# Allegro board SAMA5D2-XULT RevA.brd
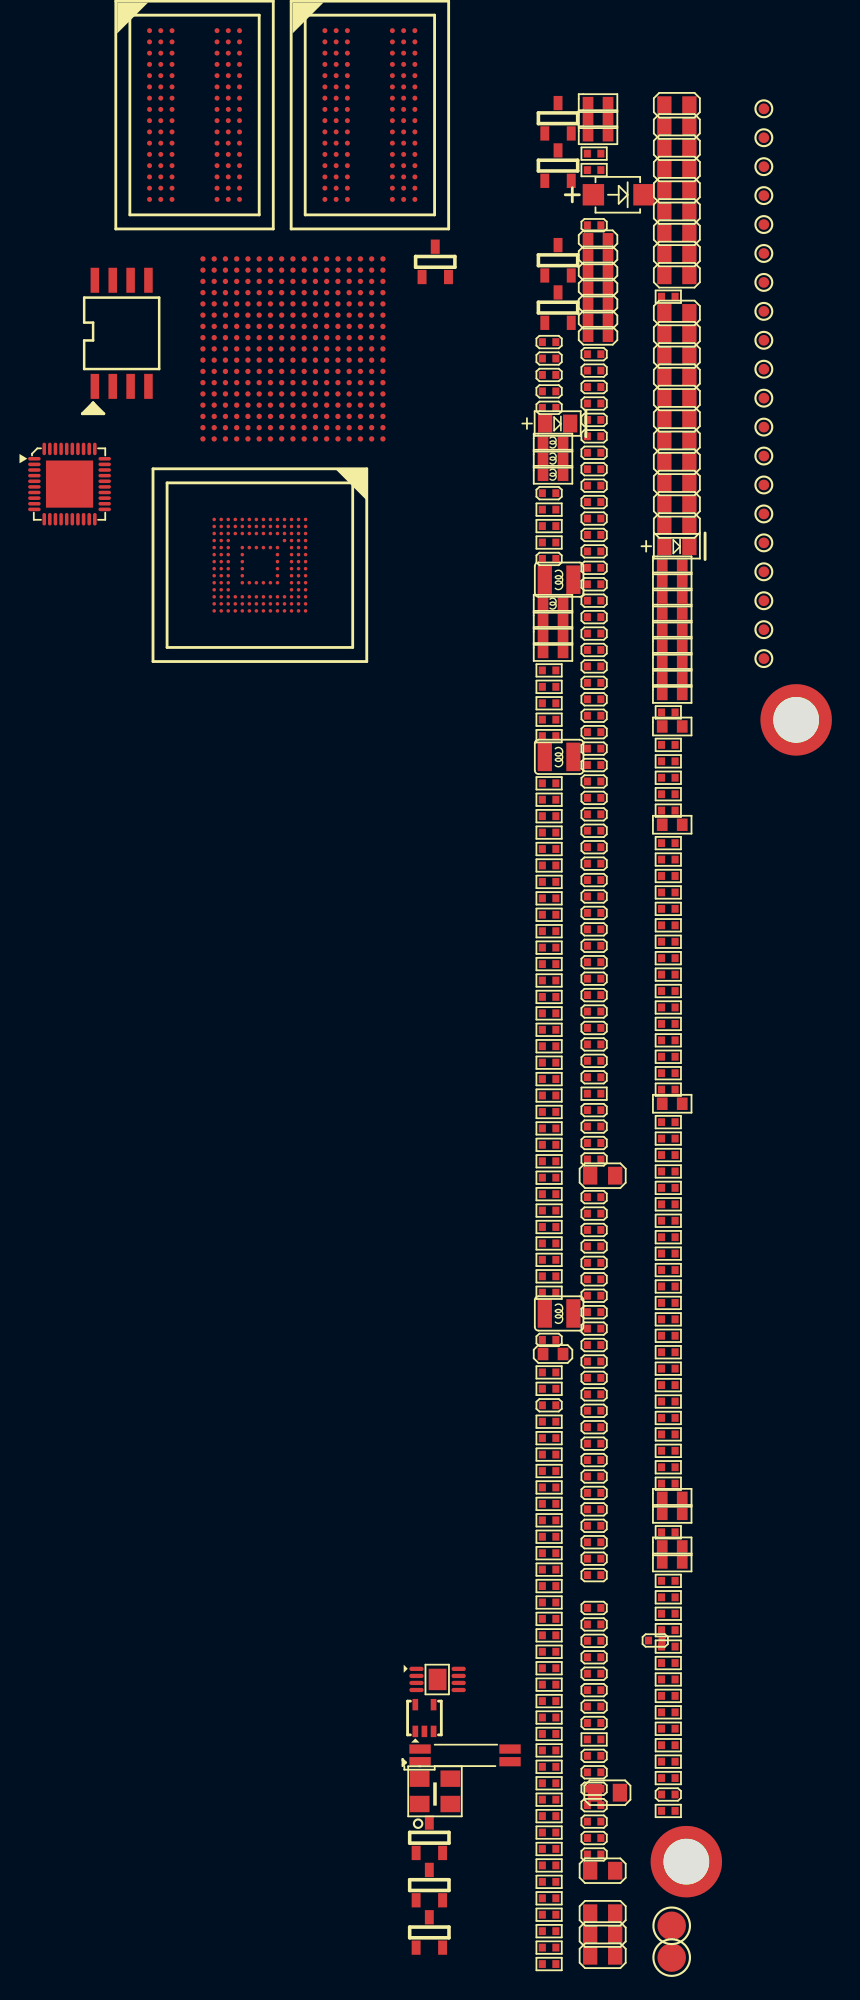
[diagram p0: board, top side]
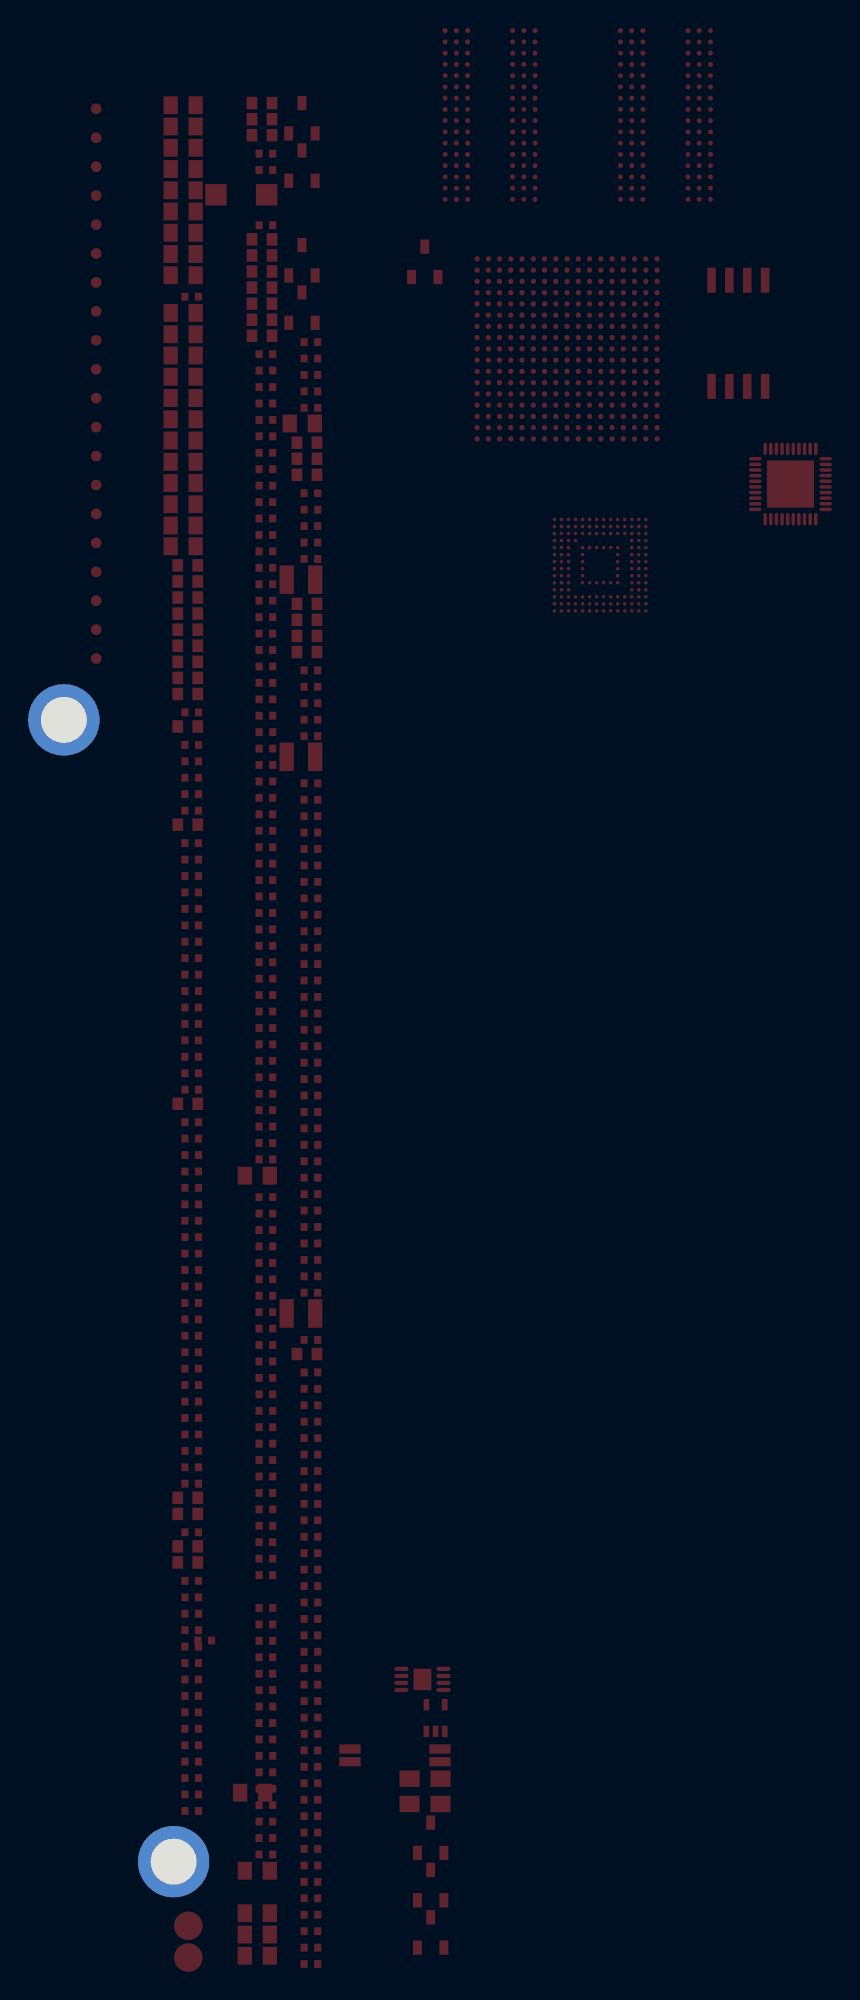
[diagram p1: board, bottom side, seen from below]

No outline. copper layers: TOP, GND2, INT3, INT4, VCC5, BOTTOM. Coordinates in mm from the lowest, leftmost part position.

## Design rules (mm)
net group DIFFPAIR26: nets USBA_DM USBA_DP
net group DIFFPAIR36: nets USBB_DM USBB_DP
net group DIFFPAIR37: nets DDR_CLK+ DDR_CLK-
net group DIFFPAIR38: nets DDR_DQS1+ DDR_DQS1-
net group DIFFPAIR39: nets DDR_DQS2+ DDR_DQS2-
net group DIFFPAIR40: nets DDR_DQS0+ DDR_DQS0-
net group DIFFPAIR41: nets DDR_DQS3+ DDR_DQS3-

## Placement (name value [footprint] x y rotation side)
C1  100nF  [C0402]  277.45 205.29 0 top
C2  10uF  [C0805]  283.33 235.98 0 top
C3  10uF  [C0805]  283.33 237.49 0 top
C7  DNP(1nF)  [C0402]  274.25 208.26 0 top
C8  100nF  [C0402]  277.45 204.12 0 top
C10  100nF  [C0402]  277.45 202.95 0 top
C13  4.7uF  [C0805]  283.33 219.7 0 top
C17  4.7uF  [C0805]  283.33 222.72 0 top
C20  10uF  [C0805]  278.06 111.97 0 top
C22  10uF  [C0805]  278.06 108.95 0 top
C23  10uF  [C0805]  278.06 110.46 0 top
C24  100nF  [C0402]  277.45 209.96 0 top
C27  10uF  [C0805]  283.33 234.47 0 top
C28  10uF  [C0805]  278.06 164.41 0 top
C29  100nF  [C0402]  277.45 198.28 0 top
C30  1nF  [C0402]  277.45 123.16 0 top
C31  100nF  [C0402]  277.45 200.62 0 top
C37  10uF  [C0805]  283.33 240.52 0 top
C38  100nF  [C0402]  277.45 206.46 0 top
C40  22pF  [C0402]  274.25 220.17 0 top
C41  22pF  [C0402]  274.25 221.34 0 top
C43  4.7uF  [C0805]  283.33 215.17 0 top
C44  DNP(1uF)  [C0603]  274.53 151.73 0 top
C45  100nF  [C0402]  277.45 167.9 0 top
C46  100nF  [C0402]  277.45 222.82 0 top
C47  27pF  [C0402]  274.25 219 0 top
C48  27pF  [C0402]  274.25 212.93 0 top
C51  100nF  [C0402]  277.45 221.65 0 top
C52  100nF  [C0402]  277.45 211.13 0 top
C54  100nF  [C0402]  277.45 132.51 0 top
C55  100nF  [C0402]  277.45 131.34 0 top
C56  4.7uF  [C0805]  283.33 225.75 0 top
C58  100nF  [C0402]  277.45 219.31 0 top
C59  10uF  [C0805]  283.33 228.43 0 top
C60  10uF  [C0805]  283.33 239.01 0 top
C61  2.2uF  [C0603]  277.73 227.55 0 top
C63  100nF  [C0402]  277.45 212.3 0 top
C65  100nF  [C0402]  277.45 147.7 0 top
C66  100nF  [C0402]  277.45 136.01 0 top
C67  1nF  [C0402]  277.45 125.5 0 top
C68  100nF  [C0402]  277.45 161.72 0 top
C69  100nF  [C0402]  277.45 207.63 0 top
C70  10uF  [C0805]  283.33 232.96 0 top
C71  10uF  [C0805]  283.33 231.45 0 top
C72  100nF  [C0402]  277.45 187.76 0 top
C73  2.2uF  [C0603]  277.73 226.41 0 top
C74  1nF  [C0402]  277.45 127.83 0 top
C76  100nF  [C0402]  277.45 154.71 0 top
C77  100nF  [C0402]  277.45 150.03 0 top
C78  100nF  [C0402]  277.45 130.17 0 top
C79  100nF  [C0402]  277.45 165.57 0 top
C80  100nF  [C0402]  277.45 172.58 0 top
C81  100nF  [C0402]  277.45 208.8 0 top
C82  1nF  [C0402]  277.45 126.67 0 top
C83  4.7uF  [C0805]  283.33 212.15 0 top
C84  1nF  [C0402]  277.45 119.65 0 top
C85  1uF  [C0603]  277.73 230.98 0 top
C87  100nF  [C0402]  277.45 162.89 0 top
C88  100nF  [C0402]  277.45 195.94 0 top
C89  100nF  [C0402]  277.45 153.54 0 top
C90  100nF  [C0402]  274.25 152.73 0 top
C91  100nF  [C0402]  277.45 158.21 0 top
C92  100nF  [C0402]  277.45 139.52 0 top
C93  100nF  [C0402]  277.45 148.86 0 top
C94  100nF  [C0402]  277.45 218.14 0 top
C95  100nF  [C0402]  277.45 157.04 0 top
C96  100nF  [C0402]  277.45 138.35 0 top
C97  1nF  [C0402]  277.45 117.32 0 top
C98  2.2uF  [C0603]  277.73 224.12 0 top
C99  100nF  [C0402]  277.45 137.18 0 top
C100  100nF  [C0402]  277.45 129 0 top
C101  100nF  [C0402]  277.45 166.73 0 top
C102  100nF  [C0402]  277.45 194.78 0 top
C103  100nF  [C0402]  277.45 176.08 0 top
C104  100nF  [C0402]  277.45 173.74 0 top
C105  1nF  [C0402]  277.45 118.49 0 top
C106  22pF  [C0402]  274.25 223.68 0 top
C107  100nF  [C0402]  277.45 177.25 0 top
C108  100nF  [C0402]  277.45 199.45 0 top
C109  22pF  [C0402]  274.25 222.51 0 top
C110  100nF  [C0402]  277.45 145.36 0 top
C111  100nF  [C0402]  277.45 191.27 0 top
C112  100nF  [C0402]  277.45 152.37 0 top
C113  100nF  [C0402]  277.45 186.6 0 top
C114  100nF  [C0402]  282.72 120.41 0 top
C115  100nF  [C0402]  277.45 143.02 0 top
C116  100nF  [C0402]  277.45 141.85 0 top
C117  100nF  [C0402]  277.45 216.97 0 top
C118  100nF  [C0402]  277.45 185.43 0 top
C119  100nF  [C0402]  277.45 171.41 0 top
C120  100nF  [C0402]  277.45 192.44 0 top
C121  100nF  [C0402]  277.45 155.88 0 top
C122  1nF  [C0402]  277.45 121.99 0 top
C123  100nF  [C0402]  277.45 146.53 0 top
C124  2.2uF  [C0603]  277.73 228.7 0 top
C125  100nF  [C0402]  277.45 169.07 0 top
C126  100nF  [C0402]  277.45 174.91 0 top
C127  10pF  [C0402]  277.45 116.15 0 top
C128  100nF  [C0402]  277.45 178.42 0 top
C129  100nF  [C0402]  277.45 151.2 0 top
C130  100nF  [C0402]  277.45 213.47 0 top
C131  100nF  [C0402]  277.45 193.61 0 top
C132  100nF  [C0402]  277.45 197.11 0 top
C133  100nF  [C0402]  277.45 188.93 0 top
C134  100nF  [C0402]  277.45 133.68 0 top
C135  100nF  [C0402]  277.45 180.75 0 top
C136  100nF  [C0402]  281.8 131.36 0 top
C137  1nF  [C0402]  277.45 120.82 0 top
C138  100nF  [C0402]  277.45 183.09 0 top
C139  100nF  [C0402]  277.45 215.81 0 top
C140  100nF  [C0402]  277.45 190.1 0 top
C141  1nF  [C0402]  277.45 231.99 0 top
C142  4.7uF  [C0805]  283.33 213.66 0 top
C143  100nF  [C0402]  277.45 201.79 0 top
C144  100nF  [C0402]  277.45 179.59 0 top
C145  100nF  [C0402]  277.45 184.26 0 top
C146  100nF  [C0402]  277.45 159.38 0 top
C147  4.7uF  [C0805]  283.33 216.68 0 top
C148  4.7uF  [C0805]  283.33 210.63 0 top
C149  100nF  [C0402]  277.45 144.19 0 top
C150  100nF  [C0402]  277.45 140.69 0 top
C151  100nF  [C0402]  277.45 214.64 0 top
C152  2.2uF  [C0603]  277.73 229.84 0 top
C153  100nF  [C0402]  277.45 160.55 0 top
C154  2.2uF  [C0603]  277.73 225.27 0 top
C161  100nF  [C0402]  277.45 181.92 0 top
C163  10uF  [C0805]  283.33 229.94 0 top
C164  10uF  [C0805]  278.06 114.99 0 top
C165  4.7uF  [C0805]  283.33 218.19 0 top
C166  47nF  [C0402]  274.25 148.09 0 top
C167  100nF  [C0402]  277.45 220.48 0 top
C169  4.7uF  [C0805]  283.33 224.24 0 top
C173  4.7uF  [C0805]  283.33 221.21 0 top
C176  10uF  [C0805]  278.39 120.54 0 top
D1  RED  [LED0805]  274.86 217.89 0 top
D3  BLUE  [LED0805]  283.33 209.16 0 top
D6  BAT54C  [SOT23_123]  265.73 117.34 0 top
D9  (replaced with 0R-1206 -see User Guide)  [SOD123]  279.2 234.15 0 top
L1  2.2uH  [L1008]  274.96 154.61 0 top
L3  180ohm at 100MHz  [R0603]  283 198.66 0 top
L5  2.2uH  [L1008]  274.96 194.19 0 top
L6  2.2uH  [L1008]  274.96 206.79 0 top
L7  180ohm at 100MHz  [R0603]  283 203.23 0 top
L8  180ohm at 100MHz  [R0603]  283 204.37 0 top
L9  180ohm at 100MHz  [R0603]  283 206.66 0 top
L10  180ohm at 100MHz  [R0603]  283 207.8 0 top
L12  10uH_150mA  [L0603]  274.53 216.53 0 top
L14  10uH_150mA  [L0603]  274.53 205.07 0 top
L16  180ohm at 100MHz  [R0603]  283 205.52 0 top
L18  180ohm at 100MHz  [R0603]  283 200.94 0 top
L19  180ohm at 100MHz  [R0603]  283 199.8 0 top
L20  10uH_150mA  [L0603]  274.53 215.38 0 top
L22  10uH_150mA  [L0603]  274.53 214.24 0 top
L23  180ohm at 100MHz  [R0603]  283 202.09 0 top
MH1  PTH  [MHC50D30]  291.82 196.82 0 top
MH2  PTH  [MHC50D30]  284.01 115.64 0 top
NOREF  -  []  120.93 117 90 top
NOREF#2  -  []  32.93 117 0 top
NOREF#3  -  []  74.5 161.16 0 top
NOREF#4  -  []  0 233.93 270 bottom
NOREF#5  -  []  59.21 0 270 bottom
NOREF#6  -  []  139.89 317.19 90 bottom
Q1  BSS138  [SOT23_123]  274.88 229.49 0 top
Q2  BSS138  [SOT23_123]  265.73 113.97 0 top
Q3  BSS138  [SOT23_123]  274.88 226.13 0 top
Q6  BSS138  [SOT23_123]  274.88 236.22 0 top
Q8  BSS138  [SOT23_123]  274.88 239.59 0 top
Q9  BSS138  [SOT23_123]  265.73 110.61 0 top
R6  10K  [R0402]  274.25 136.4 0 top
R7  10K  [R0402]  274.25 135.23 0 top
R8  68K  [R0402]  274.25 141.08 0 top
R9  1K  [R0402]  274.25 143.41 0 top
R12  100K  [R0402]  274.25 156.09 0 top
R13  49.9K 1%  [R0402]  282.72 125.09 0 top
R14  49.9K 1%  [R0402]  282.72 126.26 0 top
R15  100K  [R0402]  274.25 195.66 0 top
R16  100R 1%  [R0402]  274.25 120.04 0 top
R17  100R 1%  [R0402]  274.25 118.88 0 top
R18  11K 1%  [R0402]  274.25 200.33 0 top
R19  0R  [R0402]  282.72 135.6 0 top
R20  100R 1%  [R0402]  274.25 117.71 0 top
R21  2.2M 1%  [R0402]  274.25 158.42 0 top
R22  1.5M 1%  [R0402]  274.25 157.26 0 top
R24  DNP(3.9K 1%)  [R0402]  274.25 149.25 0 top
R26  DNP(8.2K 1%)  [R0402]  274.25 182.96 0 top
R27  2.43K 1%  [R0402]  274.25 189.97 0 top
R30  0R  [R0402]  282.72 133.27 0 top
R41  DNP(0R)  [R0402]  282.72 195.04 0 top
R44  100R 1%  [R0402]  274.25 150.42 0 top
R45  1K  [R0402]  274.25 145.75 0 top
R47  22R  [R0402]  282.72 190.36 0 top
R48  10K  [R0402]  274.25 128.22 0 top
R49  39R  [R0402]  282.72 139.06 0 top
R60  10K  [R0402]  274.25 127.06 0 top
R61  22R  [R0402]  282.72 144.85 0 top
R63  470R  [R0402]  274.25 142.24 0 top
R65  10K  [R0402]  274.25 129.39 0 top
R66  10K  [R0402]  274.25 125.89 0 top
R69  1K  [R0402]  274.25 144.58 0 top
R72  22R  [R0402]  277.45 124.33 0 top
R73  22R  [R0402]  282.72 188.05 0 top
R83  22R  [R0402]  282.72 158.87 0 top
R84  22R  [R0402]  282.72 186.88 0 top
R85  22R  [R0402]  282.72 185.72 0 top
R86  22R  [R0402]  282.72 153.03 0 top
R87  22R  [R0402]  282.72 160.04 0 top
R88  22R  [R0402]  282.72 181.04 0 top
R89  22R  [R0402]  282.72 182.21 0 top
R90  22R  [R0402]  282.72 197.35 0 top
R91  100R 1%  [R0402]  274.25 111.87 0 top
R94  100R 1%  [R0402]  274.25 113.03 0 top
R96  DNP(0R)  [R0402]  274.25 209.43 0 top
R97  22R  [R0402]  282.72 168.22 0 top
R100  10K  [R0402]  274.25 138.74 0 top
R101  22R  [R0402]  282.72 192.7 0 top
R102  22R  [R0402]  282.72 191.53 0 top
R103  DNP(1M)  [R0402]  274.25 121.21 0 top
R105  47K  [R0402]  274.25 181.79 0 top
R107  22R  [R0402]  282.72 226.9 0 top
R108  22R  [R0402]  282.72 171.7 0 top
R109  22R  [R0402]  282.72 147.18 0 top
R115  22R  [R0402]  282.72 148.35 0 top
R117  100R 1%  [R0402]  274.25 109.53 0 top
R119  100R 1%  [R0402]  274.25 110.7 0 top
R121  DNP(0R)  [R0402]  274.25 210.6 0 top
R123  100R 1%  [R0402]  274.25 114.2 0 top
R124  240R 1%  [R0402]  274.25 159.59 0 top
R125  2.2K  [R0402]  274.25 187.63 0 top
R126  2.2K  [R0402]  274.25 188.8 0 top
R127  10K  [R0402]  274.25 134.07 0 top
R128  DNP(10K)  [R0402]  274.25 124.72 0 top
R129  2R2  [R0603]  274.53 203.93 0 top
R131  1R 1%  [R0603]  277.73 240.67 0 top
R138  DNP(1M)  [R0402]  274.25 122.38 0 top
R139  DNP(2.2K)  [R0402]  274.25 166.6 0 top
R140  39R  [R0402]  282.72 122.75 0 top
R142  47K  [R0402]  274.25 180.62 0 top
R143  22R  [R0402]  282.72 155.36 0 top
R144  47K  [R0402]  274.25 178.29 0 top
R145  22R  [R0402]  282.72 175.2 0 top
R146  100R 1%  [R0402]  274.25 115.37 0 top
R147  47K  [R0402]  274.25 177.12 0 top
R149  47K  [R0402]  274.25 170.11 0 top
R151  47K  [R0402]  274.25 174.78 0 top
R152  1K  [R0402]  274.25 146.92 0 top
R153  DNP(100R 1%)  [R0402]  277.45 237.08 0 top
R154  22R  [R0402]  282.72 174.03 0 top
R155  0R  [R0402]  282.72 132.1 0 top
R157  22R  [R0402]  282.72 150.69 0 top
R158  DNP(0R)  [R0402]  282.72 193.87 0 top
R159  22R  [R0402]  282.72 161.21 0 top
R163  39R  [R0402]  282.72 119.24 0 top
R164  22R  [R0402]  282.72 154.2 0 top
R165  39R  [R0402]  282.72 142.51 0 top
R167  22R  [R0402]  282.72 149.52 0 top
R168  22R  [R0402]  282.72 146.02 0 top
R169  22R  [R0402]  282.72 157.7 0 top
R172  22R  [R0402]  282.72 179.87 0 top
R173  22R  [R0402]  282.72 178.71 0 top
R174  22R  [R0402]  282.72 177.54 0 top
R175  22R  [R0402]  282.72 176.37 0 top
R178  0R  [R0402]  282.72 128.59 0 top
R179  DNP(1K)  [R0402]  274.25 163.1 0 top
R180  6.8K 1%  [R0402]  274.25 164.27 0 top
R181  6.8K 1%  [R0402]  274.25 165.43 0 top
R182  1R 1%  [R0603]  277.73 238.38 0 top
R195  DNP  [R0402]  277.45 170.24 0 top
R210  DNP(0R)  [R0603]  283 136.91 0 top
R212  DNP(0R)  [R0603]  283 138.05 0 top
R218  10K  [R0402]  274.25 131.73 0 top
R226  10K  [R0402]  274.25 132.9 0 top
R227  100R 1%  [R0402]  274.25 116.54 0 top
R230  10K  [R0402]  274.25 139.91 0 top
R232  47K  [R0402]  274.25 172.45 0 top
R233  47K  [R0402]  274.25 173.61 0 top
R234  47K  [R0402]  274.25 175.95 0 top
R235  DNP(47K)  [R0402]  274.25 168.94 0 top
R236  47K  [R0402]  274.25 171.28 0 top
R237  47K  [R0402]  274.25 179.46 0 top
R238  240R 1%  [R0402]  274.25 160.76 0 top
R242  100K  [R0402]  274.25 191.14 0 top
R243  100K  [R0402]  274.25 192.31 0 top
R250  23.2K 1%  [R0402]  274.25 211.76 0 top
R254  DNP(1K)  [R0402]  274.25 161.93 0 top
R255  DNP(47K)  [R0402]  274.25 167.77 0 top
R256  20K 1%  [R0402]  274.25 184.13 0 top
R258  0R  [R0402]  282.72 127.42 0 top
R263  5.62K 1%  [R0402]  277.45 235.91 0 top
R264  0R  [R0603]  283 169.52 0 top
R267  22R  [R0402]  282.72 162.37 0 top
R269  1R 1%  [R0603]  277.73 239.53 0 top
R270  0R  [R0402]  282.72 130.93 0 top
R272  10K  [R0402]  274.25 137.57 0 top
R274  22R  [R0402]  282.72 172.86 0 top
R278  39R  [R0402]  282.72 129.76 0 top
R279  39R  [R0402]  282.72 121.58 0 top
R280  100R 1%  [R0402]  274.25 108.36 0 top
R281  0R  [R0402]  282.72 134.43 0 top
R282  39R  [R0402]  282.72 143.68 0 top
R284  0R  [R0603]  283 189.36 0 top
R285  39R  [R0402]  282.72 123.92 0 top
R288  22R  [R0402]  282.72 184.55 0 top
R289  22R  [R0402]  282.72 151.86 0 top
R291  22R  [R0402]  282.72 164.71 0 top
R293  2R2  [R0603]  274.53 202.79 0 top
R296  22R  [R0402]  282.72 163.54 0 top
R297  22R  [R0402]  282.72 167.05 0 top
R300  2R2  [R0603]  274.53 201.64 0 top
R303  0R  [R0603]  283 140.36 0 top
R304  22R  [R0402]  282.72 170.53 0 top
R306  2.2K  [R0402]  274.25 186.47 0 top
R307  22R  [R0402]  282.72 183.38 0 top
R308  22R  [R0402]  282.72 165.88 0 top
R309  2.2K  [R0402]  274.25 185.3 0 top
R316  0R  [R0402]  282.72 156.53 0 top
R319  10K  [R0402]  274.25 130.56 0 top
R320  DNP(10K)  [R0402]  274.25 123.55 0 top
R327  0R  [R0603]  283 196.35 0 top
R330  0R  [R0603]  283 141.51 0 top
R332  100K  [R0402]  274.25 196.83 0 top
R333  100K  [R0402]  274.25 199.17 0 top
R346  100K  [R0402]  274.25 198 0 top
TP3  SMD  [TP30]  289.52 211.46 0 top
TP5  SMD  [TP30]  289.52 219.69 0 top
TP6  SMD  [TP30]  289.52 215.57 0 top
TP7  SMD  [TP30]  289.52 217.63 0 top
TP8  SMD  [TP30]  289.52 234.09 0 top
TP9  SMD  [TP30]  289.52 221.75 0 top
TP10  SMD  [TP30]  289.52 203.23 0 top
TP11  SMD  [TP80]  282.97 111.08 0 top
TP13  SMD  [TP30]  289.52 227.92 0 top
TP14  SMD  [TP80]  282.97 108.82 0 top
TP15  SMD  [TP30]  289.52 213.52 0 top
TP16  SMD  [TP30]  289.52 236.15 0 top
TP17  SMD  [TP30]  289.52 238.21 0 top
TP18  SMD  [TP30]  289.52 223.8 0 top
TP19  SMD  [TP30]  289.52 225.86 0 top
TP20  SMD  [TP30]  289.52 201.17 0 top
TP21  SMD  [TP30]  289.52 232.03 0 top
TP23  SMD  [TP30]  289.52 205.29 0 top
TP24  SMD  [TP30]  289.52 207.34 0 top
TP25  SMD  [TP30]  289.52 209.4 0 top
TP26  SMD  [TP30]  289.52 229.98 0 top
TP30  SMD  [TP30]  289.52 240.26 0 top
U2  ACT8945AQJ405-T  [QFN40_1P4H]  240.14 213.58 0 top
U4  MT41K128M16JT-125:K  [BGADDR96P8B90X140]  249.03 239.82 0 top
U7  TLV431A  [SOT23_123]  266.15 229.38 0 top
U8  MT41K128M16JT-125:K  [BGADDR96P8B90X140]  261.5 239.82 0 top
U10  MX25L25673GM2I-08G  [SOIC8JG]  243.85 224.3 0 top
U11  MTFC4GLDEA-0M WT  [BGA153P5]  253.68 207.82 270 top
U15  NL17SZ126DFT2G  [SOT353_5]  265.38 125.85 0 top
U18  AT24MAC402-MAHM-T  [DFN8_1P5R]  266.32 128.59 0 top
U24  SAMA5D27C-CU (MRLC)  [BGA289P8]  256.03 223.19 0 top
Y3  32.768KHz CL=12.5pF  [X4S70X15]  268.27 123.19 0 top
Y4  12MHz CL=15pF  [X4S32X25]  266.13 120.64 0 top

## Library data of the parts
C1 C7 C8 C10 C24 C29-C31 C38 C40 C41 C45-C48 C51 C52 C54 C55 C58 C63 C65-C69 C72 C74 C76-C82 C84 C87-C97 C99-C123 C125-C141 C143-C146 C149-C151 C153 C161 C167 = C0402
C2 C3 C13 C17 C20 C22 C23 C27 C28 C37 C43 C44 C56 C59-C61 C70 C71 C73 C83 C85 C98 C124 C142 C147 C148 C152 C154 C163-C165 C169 C173 C176 = C0603
C166 = C_Generic
D1 = Led RED KPG-1608_0
D3 = Led Blue KPG-1608_0
D6 = SSL-LX15D-RP/SOT23_2
D9 = RB160M-60TR
L1 L5 L6 = L_10uH-150 mA
L3 L7-L10 L16 L18 L19 L23 = BEAD_ FERRITE
L12 L14 L20 L22 = L_SMT
MH1 MH2 = PTH_2
Q1-Q3 Q6 Q8 Q9 = IRLML2402_0
R6-R9 R12-R22 R24 R26 R27 R30 R41 R45 R48 R49 R60 R63 R65 R66 R69 R91 R94 R100 R103 R105 R117 R119 R123 R124 R127-R129 R131 R138 R140 R142 R144 R146 R147 R149 R151-R153 R155 R158 R163 R165 R178-R182 R195 R210 R212 R218 R226 R227 R230 R232-R238 R242 R243 R250 R254-R256 R258 R263 R264 R269 R270 R272 R278-R282 R284 R285 R293 R300 R303 R316 R319 R320 R327 R330 R332 R333 R346 = R_Generic
R44 R47 R61 R72 R73 R83-R90 R96 R97 R101 R102 R107-R109 R115 R121 R125 R126 R139 R143 R145 R154 R157 R159 R164 R167-R169 R172-R175 R267 R274 R288 R289 R291 R296 R297 R304 R306-R309 = R_Generic_0
TP3 TP5-TP11 TP13-TP21 TP23-TP26 TP30 = TP
U2 = ACT8945A
U4 U8 = MT41K128M16JT-125
U7 = TLV431A
U10 = QSPI_8Pin
U11 = eMMC
U15 = 1G126_0
U18 = AT24C08B-PU
U24 = SAMA5D27_CU_MRLC
Y3 = 32_0.768K
Y4 = XTAL_13Y_A

## Footprints (pads in the part's own frame, mm; a bottom-side part is the same pattern mirrored in y, then rotated)
BGA153P5
  round 0.254 smd: A1(-3.25,3.25) A2(-2.75,3.25) A3(-2.25,3.25) A4(-1.75,3.25) A5(-1.25,3.25) A6(-0.75,3.25) A7(-0.25,3.25) A8(0.25,3.25) A9(0.75,3.25) A10(1.25,3.25) A11(1.75,3.25) A12(2.25,3.25) A13(2.75,3.25) A14(3.25,3.25) B1(-3.25,2.75) B2(-2.75,2.75) B3(-2.25,2.75) B4(-1.75,2.75) B5(-1.25,2.75) B6(-0.75,2.75) B7(-0.25,2.75) B8(0.25,2.75) B9(0.75,2.75) B10(1.25,2.75) B11(1.75,2.75) B12(2.25,2.75) B13(2.75,2.75) B14(3.25,2.75) C1(-3.25,2.25) C2(-2.75,2.25) C3(-2.25,2.25) C4(-1.75,2.25) C5(-1.25,2.25) C6(-0.75,2.25) C7(-0.25,2.25) C8(0.25,2.25) C9(0.75,2.25) C10(1.25,2.25) C11(1.75,2.25) C12(2.25,2.25) C13(2.75,2.25) C14(3.25,2.25) D1(-3.25,1.75) D2(-2.75,1.75) D3(-2.25,1.75) D4(-1.75,1.75) D12(2.25,1.75) D13(2.75,1.75) D14(3.25,1.75) E1(-3.25,1.25) E2(-2.75,1.25) E3(-2.25,1.25) E5(-1.25,1.25) E6(-0.75,1.25) E7(-0.25,1.25) E8(0.25,1.25) E9(0.75,1.25) E10(1.25,1.25) E12(2.25,1.25) E13(2.75,1.25) E14(3.25,1.25) F1(-3.25,0.75) F2(-2.75,0.75) F3(-2.25,0.75) F5(-1.25,0.75) F10(1.25,0.75) F12(2.25,0.75) F13(2.75,0.75) F14(3.25,0.75) G1(-3.25,0.25) G2(-2.75,0.25) G3(-2.25,0.25) G5(-1.25,0.25) G10(1.25,0.25) G12(2.25,0.25) G13(2.75,0.25) G14(3.25,0.25) H1(-3.25,-0.25) H2(-2.75,-0.25) H3(-2.25,-0.25) H5(-1.25,-0.25) H10(1.25,-0.25) H12(2.25,-0.25) H13(2.75,-0.25) H14(3.25,-0.25) J1(-3.25,-0.75) J2(-2.75,-0.75) J3(-2.25,-0.75) J5(-1.25,-0.75) J10(1.25,-0.75) J12(2.25,-0.75) J13(2.75,-0.75) J14(3.25,-0.75) K1(-3.25,-1.25) K2(-2.75,-1.25) K3(-2.25,-1.25) K5(-1.25,-1.25) K6(-0.75,-1.25) K7(-0.25,-1.25) K8(0.25,-1.25) K9(0.75,-1.25) K10(1.25,-1.25) K12(2.25,-1.25) K13(2.75,-1.25) K14(3.25,-1.25) L1(-3.25,-1.75) L2(-2.75,-1.75) L3(-2.25,-1.75) L12(2.25,-1.75) L13(2.75,-1.75) L14(3.25,-1.75) M1(-3.25,-2.25) M2(-2.75,-2.25) M3(-2.25,-2.25) M4(-1.75,-2.25) M5(-1.25,-2.25) M6(-0.75,-2.25) M7(-0.25,-2.25) M8(0.25,-2.25) M9(0.75,-2.25) M10(1.25,-2.25) M11(1.75,-2.25) M12(2.25,-2.25) M13(2.75,-2.25) M14(3.25,-2.25) N1(-3.25,-2.75) N2(-2.75,-2.75) N3(-2.25,-2.75) N4(-1.75,-2.75) N5(-1.25,-2.75) N6(-0.75,-2.75) N7(-0.25,-2.75) N8(0.25,-2.75) N9(0.75,-2.75) N10(1.25,-2.75) N11(1.75,-2.75) N12(2.25,-2.75) N13(2.75,-2.75) N14(3.25,-2.75) P1(-3.25,-3.25) P2(-2.75,-3.25) P3(-2.25,-3.25) P4(-1.75,-3.25) P5(-1.25,-3.25) P6(-0.75,-3.25) P7(-0.25,-3.25) P8(0.25,-3.25) P9(0.75,-3.25) P10(1.25,-3.25) P11(1.75,-3.25) P12(2.25,-3.25) P13(2.75,-3.25) P14(3.25,-3.25)
BGA289P8
  round 0.381 smd: A1(-6.4,6.4) A2(-5.6,6.4) A3(-4.8,6.4) A4(-4,6.4) A5(-3.2,6.4) A6(-2.4,6.4) A7(-1.6,6.4) A8(-0.8,6.4) A9(0,6.4) A10(0.8,6.4) A11(1.6,6.4) A12(2.4,6.4) A13(3.2,6.4) A14(4,6.4) A15(4.8,6.4) A16(5.6,6.4) A17(6.4,6.4) B1(-6.4,5.6) B2(-5.6,5.6) B3(-4.8,5.6) B4(-4,5.6) B5(-3.2,5.6) B6(-2.4,5.6) B7(-1.6,5.6) B8(-0.8,5.6) B9(0,5.6) B10(0.8,5.6) B11(1.6,5.6) B12(2.4,5.6) B13(3.2,5.6) B14(4,5.6) B15(4.8,5.6) B16(5.6,5.6) B17(6.4,5.6) C1(-6.4,4.8) C2(-5.6,4.8) C3(-4.8,4.8) C4(-4,4.8) C5(-3.2,4.8) C6(-2.4,4.8) C7(-1.6,4.8) C8(-0.8,4.8) C9(0,4.8) C10(0.8,4.8) C11(1.6,4.8) C12(2.4,4.8) C13(3.2,4.8) C14(4,4.8) C15(4.8,4.8) C16(5.6,4.8) C17(6.4,4.8) D1(-6.4,4) D2(-5.6,4) D3(-4.8,4) D4(-4,4) D5(-3.2,4) D6(-2.4,4) D7(-1.6,4) D8(-0.8,4) D9(0,4) D10(0.8,4) D11(1.6,4) D12(2.4,4) D13(3.2,4) D14(4,4) D15(4.8,4) D16(5.6,4) D17(6.4,4) E1(-6.4,3.2) E2(-5.6,3.2) E3(-4.8,3.2) E4(-4,3.2) E5(-3.2,3.2) E6(-2.4,3.2) E7(-1.6,3.2) E8(-0.8,3.2) E9(0,3.2) E10(0.8,3.2) E11(1.6,3.2) E12(2.4,3.2) E13(3.2,3.2) E14(4,3.2) E15(4.8,3.2) E16(5.6,3.2) E17(6.4,3.2) F1(-6.4,2.4) F2(-5.6,2.4) F3(-4.8,2.4) F4(-4,2.4) F5(-3.2,2.4) F6(-2.4,2.4) F7(-1.6,2.4) F8(-0.8,2.4) F9(0,2.4) F10(0.8,2.4) F11(1.6,2.4) F12(2.4,2.4) F13(3.2,2.4) F14(4,2.4) F15(4.8,2.4) F16(5.6,2.4) F17(6.4,2.4) G1(-6.4,1.6) G2(-5.6,1.6) G3(-4.8,1.6) G4(-4,1.6) G5(-3.2,1.6) G6(-2.4,1.6) G7(-1.6,1.6) G8(-0.8,1.6) G9(0,1.6) G10(0.8,1.6) G11(1.6,1.6) G12(2.4,1.6) G13(3.2,1.6) G14(4,1.6) G15(4.8,1.6) G16(5.6,1.6) G17(6.4,1.6) H1(-6.4,0.8) H2(-5.6,0.8) H3(-4.8,0.8) H4(-4,0.8) H5(-3.2,0.8) H6(-2.4,0.8) H7(-1.6,0.8) H8(-0.8,0.8) H9(0,0.8) H10(0.8,0.8) H11(1.6,0.8) H12(2.4,0.8) H13(3.2,0.8) H14(4,0.8) H15(4.8,0.8) H16(5.6,0.8) H17(6.4,0.8) J1(-6.4,0) J2(-5.6,0) J3(-4.8,0) J4(-4,0) J5(-3.2,0) J6(-2.4,0) J7(-1.6,0) J8(-0.8,0) J9(0,0) J10(0.8,0) J11(1.6,0) J12(2.4,0) J13(3.2,0) J14(4,0) J15(4.8,0) J16(5.6,0) J17(6.4,0) K1(-6.4,-0.8) K2(-5.6,-0.8) K3(-4.8,-0.8) K4(-4,-0.8) K5(-3.2,-0.8) K6(-2.4,-0.8) K7(-1.6,-0.8) K8(-0.8,-0.8) K9(0,-0.8) K10(0.8,-0.8) K11(1.6,-0.8) K12(2.4,-0.8) K13(3.2,-0.8) K14(4,-0.8) K15(4.8,-0.8) K16(5.6,-0.8) K17(6.4,-0.8) L1(-6.4,-1.6) L2(-5.6,-1.6) L3(-4.8,-1.6) L4(-4,-1.6) L5(-3.2,-1.6) L6(-2.4,-1.6) L7(-1.6,-1.6) L8(-0.8,-1.6) L9(0,-1.6) L10(0.8,-1.6) L11(1.6,-1.6) L12(2.4,-1.6) L13(3.2,-1.6) L14(4,-1.6) L15(4.8,-1.6) L16(5.6,-1.6) L17(6.4,-1.6) M1(-6.4,-2.4) M2(-5.6,-2.4) M3(-4.8,-2.4) M4(-4,-2.4) M5(-3.2,-2.4) M6(-2.4,-2.4) M7(-1.6,-2.4) M8(-0.8,-2.4) M9(0,-2.4) M10(0.8,-2.4) M11(1.6,-2.4) M12(2.4,-2.4) M13(3.2,-2.4) M14(4,-2.4) M15(4.8,-2.4) M16(5.6,-2.4) M17(6.4,-2.4) N1(-6.4,-3.2) N2(-5.6,-3.2) N3(-4.8,-3.2) N4(-4,-3.2) N5(-3.2,-3.2) N6(-2.4,-3.2) N7(-1.6,-3.2) N8(-0.8,-3.2) N9(0,-3.2) N10(0.8,-3.2) N11(1.6,-3.2) N12(2.4,-3.2) N13(3.2,-3.2) N14(4,-3.2) N15(4.8,-3.2) N16(5.6,-3.2) N17(6.4,-3.2) P1(-6.4,-4) P2(-5.6,-4) P3(-4.8,-4) P4(-4,-4) P5(-3.2,-4) P6(-2.4,-4) P7(-1.6,-4) P8(-0.8,-4) P9(0,-4) P10(0.8,-4) P11(1.6,-4) P12(2.4,-4) P13(3.2,-4) P14(4,-4) P15(4.8,-4) P16(5.6,-4) P17(6.4,-4) R1(-6.4,-4.8) R2(-5.6,-4.8) R3(-4.8,-4.8) R4(-4,-4.8) R5(-3.2,-4.8) R6(-2.4,-4.8) R7(-1.6,-4.8) R8(-0.8,-4.8) R9(0,-4.8) R10(0.8,-4.8) R11(1.6,-4.8) R12(2.4,-4.8) R13(3.2,-4.8) R14(4,-4.8) R15(4.8,-4.8) R16(5.6,-4.8) R17(6.4,-4.8) T1(-6.4,-5.6) T2(-5.6,-5.6) T3(-4.8,-5.6) T4(-4,-5.6) T5(-3.2,-5.6) T6(-2.4,-5.6) T7(-1.6,-5.6) T8(-0.8,-5.6) T9(0,-5.6) T10(0.8,-5.6) T11(1.6,-5.6) T12(2.4,-5.6) T13(3.2,-5.6) T14(4,-5.6) T15(4.8,-5.6) T16(5.6,-5.6) T17(6.4,-5.6) U1(-6.4,-6.4) U2(-5.6,-6.4) U3(-4.8,-6.4) U4(-4,-6.4) U5(-3.2,-6.4) U6(-2.4,-6.4) U7(-1.6,-6.4) U8(-0.8,-6.4) U9(0,-6.4) U10(0.8,-6.4) U11(1.6,-6.4) U12(2.4,-6.4) U13(3.2,-6.4) U14(4,-6.4) U15(4.8,-6.4) U16(5.6,-6.4) U17(6.4,-6.4)
BGADDR96P8B90X140
  round 0.356 smd: A1(-3.2,6) A2(-2.4,6) A3(-1.6,6) A7(1.6,6) A8(2.4,6) A9(3.2,6) B1(-3.2,5.2) B2(-2.4,5.2) B3(-1.6,5.2) B7(1.6,5.2) B8(2.4,5.2) B9(3.2,5.2) C1(-3.2,4.4) C2(-2.4,4.4) C3(-1.6,4.4) C7(1.6,4.4) C8(2.4,4.4) C9(3.2,4.4) D1(-3.2,3.6) D2(-2.4,3.6) D3(-1.6,3.6) D7(1.6,3.6) D8(2.4,3.6) D9(3.2,3.6) E1(-3.2,2.8) E2(-2.4,2.8) E3(-1.6,2.8) E7(1.6,2.8) E8(2.4,2.8) E9(3.2,2.8) F1(-3.2,2) F2(-2.4,2) F3(-1.6,2) F7(1.6,2) F8(2.4,2) F9(3.2,2) G1(-3.2,1.2) G2(-2.4,1.2) G3(-1.6,1.2) G7(1.6,1.2) G8(2.4,1.2) G9(3.2,1.2) H1(-3.2,0.4) H2(-2.4,0.4) H3(-1.6,0.4) H7(1.6,0.4) H8(2.4,0.4) H9(3.2,0.4) J1(-3.2,-0.4) J2(-2.4,-0.4) J3(-1.6,-0.4) J7(1.6,-0.4) J8(2.4,-0.4) J9(3.2,-0.4) K1(-3.2,-1.2) K2(-2.4,-1.2) K3(-1.6,-1.2) K7(1.6,-1.2) K8(2.4,-1.2) K9(3.2,-1.2) L1(-3.2,-2) L2(-2.4,-2) L3(-1.6,-2) L7(1.6,-2) L8(2.4,-2) L9(3.2,-2) M1(-3.2,-2.8) M2(-2.4,-2.8) M3(-1.6,-2.8) M7(1.6,-2.8) M8(2.4,-2.8) M9(3.2,-2.8) N1(-3.2,-3.6) N2(-2.4,-3.6) N3(-1.6,-3.6) N7(1.6,-3.6) N8(2.4,-3.6) N9(3.2,-3.6) P1(-3.2,-4.4) P2(-2.4,-4.4) P3(-1.6,-4.4) P7(1.6,-4.4) P8(2.4,-4.4) P9(3.2,-4.4) R1(-3.2,-5.2) R2(-2.4,-5.2) R3(-1.6,-5.2) R7(1.6,-5.2) R8(2.4,-5.2) R9(3.2,-5.2) T1(-3.2,-6) T2(-2.4,-6) T3(-1.6,-6) T7(1.6,-6) T8(2.4,-6) T9(3.2,-6)
C0402
  rect 0.508x0.559 smd: 1(-0.483,0) 2(0.483,0)
C0603
  rect 0.762x0.889 smd: 1(-0.711,0) 2(0.711,0)
C0805
  rect 1.016x1.27 smd: 1(-0.889,0) 2(0.889,0)
DFN8_1P5R
  rect 1.27x1.524 smd: (0,0)
  oval 1.016x0.305 smd: 1(-1.5,0.75) 2(-1.5,0.25) 3(-1.5,-0.25) 4(-1.5,-0.75) 5(1.5,-0.75) 6(1.5,-0.25) 7(1.5,0.25) 8(1.5,0.75)
L0603
  rect 0.762x0.889 smd: 1(-0.711,0) 2(0.711,0)
L1008
  rect 1.016x2.032 smd: 1(-1.016,0) 2(1.016,0)
LED0805
  rect 1.016x1.27 smd: 1(-0.889,0) 2(0.889,0)
MHC50D30
  round 5.08 hole 3.251: 1(0,0)
QFN40_1P4H
  oval 0.889x0.254 smd: 1(-2.5,1.8) 2(-2.5,1.4) 3(-2.5,1) 4(-2.5,0.6) 5(-2.5,0.2) 6(-2.5,-0.2) 7(-2.5,-0.6) 8(-2.5,-1) 9(-2.5,-1.4) 10(-2.5,-1.8) 21(2.5,-1.8) 22(2.5,-1.4) 23(2.5,-1) 24(2.5,-0.6) 25(2.5,-0.2) 26(2.5,0.2) 27(2.5,0.6) 28(2.5,1) 29(2.5,1.4) 30(2.5,1.8)
  oval 0.254x0.889 smd: 11(-1.8,-2.5) 12(-1.4,-2.5) 13(-1,-2.5) 14(-0.6,-2.5) 15(-0.2,-2.5) 16(0.2,-2.5) 17(0.6,-2.5) 18(1,-2.5) 19(1.4,-2.5) 20(1.8,-2.5) 31(1.8,2.5) 32(1.4,2.5) 33(1,2.5) 34(0.6,2.5) 35(0.2,2.5) 36(-0.2,2.5) 37(-0.6,2.5) 38(-1,2.5) 39(-1.4,2.5) 40(-1.8,2.5)
  rect 3.353x3.353 smd: 41(0,0)
R0402
  rect 0.508x0.559 smd: 1(-0.483,0) 2(0.483,0)
R0603
  rect 0.762x0.889 smd: 1(-0.711,0) 2(0.711,0)
SOD123
  rect 1.524x1.524 smd: 1(-1.8,0) 2(1.8,0)
SOIC8JG
  rect 0.61x1.778 smd: 1(-1.905,-3.772) 2(-0.635,-3.772) 3(0.635,-3.772) 4(1.905,-3.772) 5(1.905,3.772) 6(0.635,3.772) 7(-0.635,3.772) 8(-1.905,3.772)
SOT23_123
  rect 0.635x1.016 smd: 1(-0.94,-1.079) 2(0.94,-1.079) 3(0,1.079)
SOT353_5
  rect 0.406x0.813 smd: 1(-0.65,-0.95) 2(0,-0.95) 3(0.65,-0.95) 4(0.65,0.95) 5(-0.65,0.95)
TP30
  round 0.762 smd: 1(0,0)
TP80
  round 2.032 smd: 1(0,0)
X4S32X25
  rect 1.422x1.168 smd: 1(-1.1,-0.9) 2(1.1,-0.9) 3(1.1,0.9) 4(-1.1,0.9)
X4S70X15
  rect 1.524x0.66 smd: 1(-3.2,-0.45) 2(3.2,-0.45) 3(3.2,0.45) 4(-3.2,0.45)

## Nets
GND_POWER: C1.2 C2.2 C3.2 C7.2 C13.2 C17.2 C20.2 C22.2 C23.2 C24.2 C27.2 C28.2 C29.2 C30.2 C31.2 C37.2 C38.2 C40.2 C41.2 C43.2 C44.2 C45.2 C46.2 C47.2 C48.2 C51.2 C52.2 C54.2 C56.2 C58.2 C59.2 C60.2 C61.2 C63.2 C65.2 C66.2 C67.2 C68.2 C69.2 C70.2 C71.2 C72.2 C73.2 C74.2 C76.2 C77.2 C78.2 C79.2 C80.2 C81.2 C82.2 C83.2 C84.2 C85.2 C87.2 C88.2 C89.2 C90.2 C91.2 C92.2 C93.2 C94.2 C95.2 C96.2 C97.2 C98.2 C99.2 C100.2 C101.2 C102.2 C103.2 C104.2 C105.2 C106.2 C107.2 C108.2 C109.1 C110.2 C111.2 C112.2 C113.2 C114.2 C115.2 C116.2 C117.2 C118.2 C119.2 C120.2 C121.2 C122.2 C123.2 C124.2 C125.2 C126.2 C128.2 C129.2 C130.2 C131.2 C132.2 C133.2 C134.2 C135.2 C136.2 C137.2 C138.2 C139.2 C140.2 C141.2 C142.2 C143.2 C144.2 C145.2 C146.2 C147.2 C148.2 C149.2 C150.2 C151.2 C152.2 C153.2 C154.2 C161.2 C163.2 C164.2 C165.2 C166.2 C167.2 C169.2 C173.2 C176.2 MH1.1 MH2.1 Q1.2(S) Q2.2(S) Q3.2(S) Q6.2(S) Q8.2(S) Q9.2(S) R12.1 R19.2 R22.1 R24.2 R26.2 R27.2 R41.2 R48.2 R60.2 R66.2 R105.2 R124.2 R127.1 R139.1 R158.2 R178.2 R180.2 R195.2 R235.2 R238.2 R243.1 R250.1 R256.1 R258.2 R264.2 R272.2 R316.2 TP13.1(TP) TP19.1(TP) TP26.1(TP) U2.3(GNDA) U2.14(GNDP3) U2.37(GNDP12) U2.41(EXPAD) U4.A9(VSS1) U4.B1(VSSQ1) U4.B3(VSS2) U4.B9(VSSQ2) U4.D1(VSSQ3) U4.D8(VSSQ4) U4.E1(VSS3) U4.E2(VSSQ5) U4.E8(VSSQ6) U4.F9(VSSQ7) U4.G1(VSSQ8) U4.G8(VSS4) U4.G9(VSSQ9) U4.J2(VSS5) U4.J8(VSS6) U4.M1(VSS7) U4.M9(VSS8) U4.P1(VSS9) U4.P9(VSS10) U4.T1(VSS11) U4.T9(VSS12) U7.3(ANODE) U8.A9(VSS1) U8.B1(VSSQ1) U8.B3(VSS2) U8.B9(VSSQ2) U8.D1(VSSQ3) U8.D8(VSSQ4) U8.E1(VSS3) U8.E2(VSSQ5) U8.E8(VSSQ6) U8.F9(VSSQ7) U8.G1(VSSQ8) U8.G8(VSS4) U8.G9(VSSQ9) U8.J2(VSS5) U8.J8(VSS6) U8.M1(VSS7) U8.M9(VSS8) U8.P1(VSS9) U8.P9(VSS10) U8.T1(VSS11) U8.T9(VSS12) U10.4(GND) U11.C4(VSSQ4) U11.E7(VSS2) U11.G5(VSS1) U11.H10(VSS3) U11.K8(VSS4) U11.N2(VSSQ1) U11.N5(VSS5) U11.P4(VSSQ3) U11.P6(VSSQ2) U15.3(GND) U18.1(A0) U18.2(A1) U18.4(GND) U24.D14(GNDDDR_1) U24.E7(GNDCORE_1) U24.E9(GNDCORE_2) U24.E11(GNDDDR_2) U24.E12(GNDDDR_3) U24.E14(GNDDDR_4) U24.F6(GNDIOP0_1) U24.F9(GNDIOP2) U24.G4(GNDISC) U24.G7(GNDIOP0_2) U24.H4(GNDCORE_3) U24.H14(GNDDDR_5) U24.J14(GNDDDR_6) U24.K5(GNDANA_2) U24.K12(GNDCORE_4) U24.L3(GNDANA_1) U24.L14(GNDDDR_7) U24.M5(GNDCORE_5) U24.M9(GNDCORE_6) U24.M13(GNDIOP1_1) U24.N6(GNDBU) U24.P14(GNDIOP1_2) U24.R7(GNDUTMIC) U24.R11(GNDSDMMC) U24.T4(GNDAUDIOPLL) U24.T5(GNDDPLL) U24.T6(GNDOSC) U24.U5(GNDPLLA) Y3.2 Y3.3 Y4.2 Y4.4
GNDUTMII: C127.2 R263.2 R264.1 U24.P9(GNDUTMII)
VBAT: R21.1 U2.29(BAT1) U2.30(BAT2)
VCC_BAT: R280.1
VDD_1V2: C22.1 C27.1 C28.1 C29.1 C30.1 C31.1 C37.1 C38.1 C108.1 C119.1 C122.1 C132.1 C137.1 C143.1 L6.2 L16.1 L18.1 R129.1 TP7.1(TP) U2.34(OUT2) U24.D7(VDDCORE_1) U24.D9(VDDCORE_2) U24.H3(VDDCORE_3) U24.K13(VDDCORE_4) U24.N5(VDDCORE_5) U24.N9(VDDCORE_6)
VDD_1V35: C20.1 C23.1 C24.1 C65.1 C66.1 C67.1 C68.1 C70.1 C71.1 C74.1 C76.1 C77.1 C78.1 C80.1 C82.1 C83.1 C84.1 C87.1 C88.1 C89.1 C90.1 C92.1 C93.1 C94.1 C95.1 C96.1 C97.1 C98.1 C101.1 C102.1 C104.1 C105.1 C112.1 C113.1 C114.1 C115.1 C116.1 C117.1 C123.1 C124.1 C126.1 C129.1 C139.1 C141.1 C146.1 C149.1 C150.1 C151.1 C152.1 C153.1 C154.1 L5.2 L14.1 R179.2 R242.2 R254.2 TP6.1(TP) U2.2(OUT1) U4.A1(VDDQ1) U4.A8(VDDQ2) U4.B2(VDD1) U4.C1(VDDQ3) U4.C9(VDDQ4) U4.D2(VDDQ5) U4.D9(VDD9) U4.E9(VDDQ6) U4.F1(VDDQ7) U4.G7(VDD2) U4.H2(VDDQ8) U4.H9(VDDQ9) U4.K2(VDD4) U4.K8(VDD5) U4.N1(VDD6) U4.N9(VDD7) U4.R1(VDD8) U4.R9(VDD3) U8.A1(VDDQ1) U8.A8(VDDQ2) U8.B2(VDD1) U8.C1(VDDQ3) U8.C9(VDDQ4) U8.D2(VDDQ5) U8.D9(VDD9) U8.E9(VDDQ6) U8.F1(VDDQ7) U8.G7(VDD2) U8.H2(VDDQ8) U8.H9(VDDQ9) U8.K2(VDD4) U8.K8(VDD5) U8.N1(VDD6) U8.N9(VDD7) U8.R1(VDD8) U8.R9(VDD3) U24.D11(VDDDDR_1) U24.D12(VDDDDR_2) U24.D15(VDDDDR_3) U24.E15(VDDDDR_4) U24.H15(VDDDDR_5) U24.J15(VDDDDR_6) U24.L15(VDDDDR_7)
VDD_3V3: C1.1 C2.1 C3.1 C52.1 C63.1 C69.1 C73.1 C161.1 D6.1(A1) L1.2 L7.1 L8.1 L9.1 L10.1 R6.1 R7.1 R45.1 R65.1 R69.1 R125.2 R126.2 R210.1 R218.1 R226.1 R230.1 R306.2 R309.2 R319.1 R320.1 TP3.1(TP) U2.17(OUT3) U10.8(VCC) U11.E6(VCC3) U11.F5(VCC2) U11.J10(VCC0) U11.K9(VCC1) U15.5(VCC) U18.8(VCC)
VDD_3V3_LP: C17.1 R284.2 R293.1 R300.1 R303.2 TP5.1(TP) U2.5(OUT5)
VDD_5V_IN: C58.1 C59.1 C60.1 D9.1(ANODE) R18.1 R100.1 R152.1
VDD_LED: D3.1(ANODE) R330.1 TP25.1(TP)
VDDANA: C136.1 C144.1 L23.2 R270.2 U24.K3(VDDANA_1) U24.L5(VDDANA_2)
VDDAUDIOPLL: C140.1 C148.1 L22.2 U24.T3(VDDAUDIOPLL)
VDDB_5V: TP30.1(TP)
VDDBU: C44.1 C46.1 C134.1 D6.3(C) R128.1 R139.2 R346.2 TP17.1(TP) U24.N7(VDDBU)
VDDFUSE: C111.1 R327.1 TP15.1(TP) TP23.1(TP) U24.M12(VDDFUSE)
VDDHSIC: C118.1 L16.2 TP16.1(TP) U24.R9(VDDHSIC)
VDDIOP0: C131.1 C135.1 L9.2 U24.E6(VDDIOP0_1) U24.F7(VDDIOP0_2)
VDDIOP1: C103.1 C107.1 L8.2 U24.N13(VDDIOP1_1) U24.R14(VDDIOP1_2)
VDDIOP2: C120.1 L7.2 U24.F10(VDDIOP2)
VDDISC: C138.1 L10.2 U24.F4(VDDISC)
VDDOSC: C128.1 L20.2 R269.1 TP21.1(TP) U24.T7(VDDOSC)
VDDPLLA: C45.1 L12.2 R131.1 TP8.1(TP) U24.U4(VDDPLLA)
VDDSDHC: C61.1 C81.1 C110.1 R142.1 R144.1 R147.1 R149.1 R151.1 R210.2 R212.2 R232.1 R233.1 R234.1 R236.1 R237.1 R255.1 TP9.1(TP) U11.C6(VCCQ4) U11.M4(VCCQ5) U11.N4(VCCQ3) U11.P3(VCCQ1) U11.P5(VCCQ2) U24.P11(VDDSDMMC)
VDDSDHC1V8: L3.2 R212.1 TP10.1(TP)
VDDUTMIC: C133.1 C147.1 L18.2 TP18.1(TP) U24.P7(VDDUTMIC)
VDDUTMII: C125.1 L19.2 TP20.1(TP) U24.P8(VDDUTMII)
VIN_5V: C165.1 D9.2(CATHODE) U2.33(CHGIN)
ACN: R146.2 U24.U1(ACN)
ACP: R123.2 U24.T1(ACP)
BOOT_DIS: R226.2 R227.1 U15.1(OE)
CLASSD_R0_PB1: U24.A8(PB01)
CLASSD_R1_PB2: U24.A7(PB02)
CLASSD_R2_PB3: U24.A6(PB03)
CLASSD_R3_PB4: U24.B6(PB04)
CLK_AUDIO: U24.U3(CLK_AUDIO)
DBGU_URXD1_PD2: U24.G9(PD02)
DBGU_UTXD1_PD3: U24.K1(PD03)
DDR_A0: U4.N3(A0) U8.N3(A0) U24.F12(DDR_A0)
DDR_A1: U4.P7(A1) U8.P7(A1) U24.C17(DDR_A1)
DDR_A2: U4.P3(A2) U8.P3(A2) U24.B17(DDR_A2)
DDR_A3: U4.N2(A3) U8.N2(A3) U24.B16(DDR_A3)
DDR_A4: U4.P8(A4) U8.P8(A4) U24.C16(DDR_A4)
DDR_A5: U4.P2(A5) U8.P2(A5) U24.G14(DDR_A5)
DDR_A6: U4.R8(A6) U8.R8(A6) U24.F14(DDR_A6)
DDR_A7: U4.R2(A7) U8.R2(A7) U24.F11(DDR_A7)
DDR_A8: U4.T8(A8) U8.T8(A8) U24.C14(DDR_A8)
DDR_A9: U4.R3(A9) U8.R3(A9) U24.D13(DDR_A9)
DDR_A10: U4.L7(A10/AP) U8.L7(A10/AP) U24.C15(DDR_A10)
DDR_A11: U4.R7(A11) U8.R7(A11) U24.A16(DDR_A11)
DDR_A12: U4.N7(A12/BC#) U8.N7(A12/BC#) U24.A17(DDR_A12)
DDR_A13: U4.T3(A13) U8.T3(A13) U24.G11(DDR_A13)
DDR_BA0: U4.M2(BA0) U8.M2(BA0) U24.H12(DDR_BA0)
DDR_BA1: U4.N8(BA1) U8.N8(BA1) U24.H13(DDR_BA1)
DDR_BA2: U4.M3(BA2) U8.M3(BA2) U24.F17(DDR_BA2)
DDR_CAS: U4.K3(CAS#) U8.K3(CAS#) U24.G12(DDR_CAS)
DDR_CKE: R243.2 U4.K9(CKE) U8.K9(CKE) U24.F16(DDR_CKE)
DDR_CLK+: R153.1 U4.J7(CK) U8.J7(CK) U24.E17(DDR_CLK)
DDR_CLK-: R153.2 U4.K7(CK#) U8.K7(CK#) U24.D17(DDR_CLKN)
DDR_CS: U4.L2(CS#) U8.L2(CS#) U24.G13(DDR_CS)
DDR_D0: U8.E3(DQ0) U24.B12(DDR_D0)
DDR_D1: U8.F7(DQ1) U24.A12(DDR_D1)
DDR_D2: U8.F2(DQ2) U24.C12(DDR_D2)
DDR_D3: U8.F8(DQ3) U24.A13(DDR_D3)
DDR_D4: U8.H3(DQ4) U24.A14(DDR_D4)
DDR_D5: U8.H8(DQ5) U24.C13(DDR_D5)
DDR_D6: U8.G2(DQ6) U24.A15(DDR_D6)
DDR_D7: U8.H7(DQ7) U24.B15(DDR_D7)
DDR_D8: U8.D7(DQ8) U24.G17(DDR_D8)
DDR_D9: U8.C3(DQ9) U24.G16(DDR_D9)
DDR_D10: U8.C8(DQ10) U24.H17(DDR_D10)
DDR_D11: U8.C2(DQ11) U24.K17(DDR_D11)
DDR_D12: U8.A7(DQ12) U24.K16(DDR_D12)
DDR_D13: U8.A2(DQ13) U24.J13(DDR_D13)
DDR_D14: U8.B8(DQ14) U24.K14(DDR_D14)
DDR_D15: U8.A3(DQ15) U24.K15(DDR_D15)
DDR_D16: U4.E3(DQ0) U24.B8(DDR_D16)
DDR_D17: U4.F7(DQ1) U24.B9(DDR_D17)
DDR_D18: U4.F2(DQ2) U24.C9(DDR_D18)
DDR_D19: U4.F8(DQ3) U24.A9(DDR_D19)
DDR_D20: U4.H3(DQ4) U24.A10(DDR_D20)
DDR_D21: U4.H8(DQ5) U24.D10(DDR_D21)
DDR_D22: U4.G2(DQ6) U24.B11(DDR_D22)
DDR_D23: U4.H7(DQ7) U24.A11(DDR_D23)
DDR_D24: U4.D7(DQ8) U24.J12(DDR_D24)
DDR_D25: U4.C3(DQ9) U24.H10(DDR_D25)
DDR_D26: U4.C8(DQ10) U24.J11(DDR_D26)
DDR_D27: U4.C2(DQ11) U24.K11(DDR_D27)
DDR_D28: U4.A7(DQ12) U24.L13(DDR_D28)
DDR_D29: U4.A2(DQ13) U24.L11(DDR_D29)
DDR_D30: U4.B8(DQ14) U24.L12(DDR_D30)
DDR_D31: U4.A3(DQ15) U24.M17(DDR_D31)
DDR_DQM0: U8.E7(LDM) U24.C11(DDR_DQM0)
DDR_DQM1: U8.D3(UDM) U24.G15(DDR_DQM1)
DDR_DQM2: U4.E7(LDM) U24.C8(DDR_DQM2)
DDR_DQM3: U4.D3(UDM) U24.H11(DDR_DQM3)
DDR_DQS0+: U8.F3(LDQS) U24.B13(DDR_DQS0)
DDR_DQS0-: U8.G3(LDQS#) U24.B14(DDR_DQSN0)
DDR_DQS1+: U8.C7(UDQS) U24.J17(DDR_DQS1)
DDR_DQS1-: U8.B7(UDQS#) U24.J16(DDR_DQSN1)
DDR_DQS2+: U4.F3(LDQS) U24.C10(DDR_DQS2)
DDR_DQS2-: U4.G3(LDQS#) U24.B10(DDR_DQSN2)
DDR_DQS3+: U4.C7(UDQS) U24.L17(DDR_DQS3)
DDR_DQS3-: U4.B7(UDQS#) U24.L16(DDR_DQSN3)
DDR_RAS: U4.J3(RAS#) U8.J3(RAS#) U24.F13(DDR_RAS)
DDR_RESETN: R242.1 U4.T2(RESET#) U8.T2(RESET#) U24.E16(DDR_RESETN)
DDR_VREF: C54.1 C55.2 C72.1 C91.1 C99.1 C100.1 C121.1 C145.1 R180.1 R181.2 U4.H1(VREFDQ) U4.M8(VREFCA) U8.H1(VREFDQ) U8.M8(VREFCA) U24.D16(DDR_VREFCM) U24.H16(DDR_VREFB0)
DDR_WE: U4.L3(WE#) U8.L3(WE#) U24.F15(DDR_WE)
EEPROM_TWCK1_PD5: R297.2 U18.6(SCL)
EEPROM_TWD1_PD4: R296.2 U18.5(SDA)
EEPROM_WP: R316.1 R320.2 U18.7(WP)
ETH_GMDC_PB22: R87.2
ETH_GMDIO_PB23: R69.2 R86.2
ETH_GRX0_PB18: R65.2 R72.2
ETH_GRX1_PB19: R66.1 R73.2
ETH_GRXDV_PB16: R48.1 R61.2
ETH_GRXER_PB17: R47.2 R60.1
ETH_GTX0_PB20: R84.2
ETH_GTX1_PB21: R85.2
ETH_GTXCK_PB14: R49.2
ETH_GTXEN_PB15: R108.2
ETH_INT_PC9: R45.2 R115.2
EXP/XPRO_PB5: R109.2
EXP/XPRO_PB6: R274.2
EXP/XPRO_PD12: U24.K8(PD12)
EXP/XPRO_PD13: U24.L2(PD13)
EXP/XPRO_PD25: U24.L6(PD25)
EXP/XPRO_PD26: U24.N2(PD26)
EXP/XPRO_PD27: U24.L8(PD27)
EXP/XPRO_PD28: U24.M4(PD28)
EXP/XPRO_PD29: U24.N3(PD29)
EXP_PD6: U24.J2(PD06)
EXP_PD23: U24.M3(PD23)
EXP_PD24: U24.L7(PD24)
EXP_PD30: U24.L9(PD30)
EXP_PD31: U24.M7(PD31)
HSIC_DATA: U24.T9(HSIC_DATA)
HSIC_STRB: U24.U10(HSIC_STRB)
ISC_D0/EXP_PB26: U24.E4(PB26)
ISC_D1/EXP_PB27: U24.B1(PB27)
ISC_D2/EXP/XPRO_PB28: U24.C2(PB28)
ISC_D3/EXP/XPRO_PB29: U24.D3(PB29)
ISC_D4/EXP_PB30: U24.D2(PB30)
ISC_D5/EXP/XPRO_PB31: U24.C1(PB31)
ISC_D6/EXP/XPRO_PC0: U24.P17(PC00)
ISC_D7/SPI1_SPCK_PC1: U24.N12(PC01)
ISC_D8/SPI1_MOSI_PC2: U24.N14(PC02)
ISC_D9/SPI1_MISO_PC3: U24.M15(PC03)
ISC_D10/EXP_PB24: U24.E5(PB24)
ISC_D11/EXP_PB25: U24.B2(PB25)
ISC_HSYNC/EXP_PC6: U24.K10(PC06)
ISC_MCK/EXP_PC7: U24.M16(PC07)
ISC_PCK/SPI1_NPCS0_PC4: U24.M11(PC04)
ISC_PWD/EXP_PB12: U24.D6(PB12)
ISC_RST/EXP_PB11: U24.B5(PB11)
ISC_VSYNC/EXP_PC5: U24.L10(PC05)
JTAG_TCK_PD14: R94.2
JTAG_TDI_PD15: R91.2
JTAG_TDO_PD16: R119.2
JTAG_TMS_PD17: R117.2
LCD_AD0_XP_PD19: R96.2
LCD_AD1_XM_PD20: R121.2
LCD_AD2_YP_PD21: R102.2
LCD_AD3_YM_PD22: R101.2
LCD_DAT2_PC10: R304.2
LCD_DAT3_PC11: R90.2
LCD_DAT4_PC12: U24.E1(PC12)
LCD_DAT5_PC13: U24.F3(PC13)
LCD_DAT6_PC14: U24.F5(PC14)
LCD_DAT7_PC15: U24.F2(PC15)
LCD_DAT10_PC16: U24.G6(PC16)
LCD_DAT11_PC17: U24.F1(PC17)
LCD_DAT12_PC18: U24.H6(PC18)
LCD_DAT13_PC19: U24.G2(PC19)
LCD_DAT14_PC20: U24.G3(PC20)
LCD_DAT15_PC21: U24.G1(PC21)
LCD_DAT18_PC22: U24.H2(PC22)
LCD_DAT19_PC23: U24.G5(PC23)
LCD_DAT20_PC24: U24.H1(PC24)
LCD_DAT21_PC25: U24.H5(PC25)
LCD_DAT22_PC26: R289.2
LCD_DAT23_PC27: R288.2
LCD_DEN_PD1: R291.2
LCD_DISP_PC29: U24.G8(PC29)
LCD_HSYNC_PC31: R282.2
LCD_ID_PB0: R89.2
LCD_IRQ1_PB7: U24.C6(PB07)
LCD_IRQ2_PB8: U24.A5(PB08)
LCD_PCK_PD0: R278.2
LCD_PWM_PC28: R279.2
LCD_TWCK1_PD5: R308.2
LCD_TWD1_PD4: R307.2
LCD_VSYNC_PC30: R285.2
NPBSTAT: Q8.1(G) R333.1 U2.13(NPBSTAT)
NRST: C7.1 R6.2 R16.1 R281.1
PA14: R175.1 U24.M14(PA14)
PA15: R172.1 U24.N16(PA15)
PA16: R173.1 U24.M10(PA16)
PA17: R174.1 U24.N17(PA17)
PA18: R154.1 U24.U14(PA18)
PA19: R159.1 U24.T14(PA19)
PA20: R143.1 U24.P12(PA20)
PA21: R145.1 U24.R13(PA21)
PA22: R163.1 R165.1 U24.U15(PA22)
PA23: R164.1 U24.U16(PA23)
PA24: R157.1 U24.T15(PA24)
PA25: R168.1 U24.U17(PA25)
PA26: R169.1 U24.P13(PA26)
PB0: R88.1 R89.1 U24.J8(PB00)
PB5: R109.1 U24.B7(PB05)
PB6: R274.1 U24.C7(PB06)
PB9: R83.1 U24.A4(PB09)
PB10: R267.1 U24.H8(PB10)
PB14: R49.1 U24.C5(PB14)
PB15: R108.1 U24.H7(PB15)
PB16: R61.1 U24.D5(PB16)
PB17: R47.1 U24.C4(PB17)
PB18: R72.1 U24.A3(PB18)
PB19: R73.1 U24.D4(PB19)
PB20: R84.1 U24.B3(PB20)
PB21: R85.1 U24.A2(PB21)
PB22: R87.1 U24.C3(PB22)
PB23: R86.1 U24.A1(PB23)
PC9: R115.1 U24.D1(PC09)
PC10: R304.1 U24.E3(PC10)
PC11: R90.1 U24.E2(PC11)
PC26: R289.1 U24.J9(PC26)
PC27: R288.1 U24.H9(PC27)
PC28: R272.1 R279.1 U24.E8(PC28)
PC30: R285.1 U24.F8(PC30)
PC31: R282.1 U24.D8(PC31)
PD14: R94.1 U24.K4(PD14)
PD15: R91.1 U24.K7(PD15)
PD16: R119.1 U24.L1(PD16)
PD17: R117.1 U24.K2(PD17)
PD19: R96.1 U24.K6(PD19)
PD20: R121.1 U24.M2(PD20)
PD21: R102.1 R107.1 R126.1 U24.N1(PD21)
PD22: R97.1 R101.1 R125.1 U24.L4(PD22)
PIOBU0: U24.R3(PIOBU0)
PIOBU1: U24.N8(PIOBU1)
PIOBU2: U24.R2(PIOBU2)
PIOBU3: U24.R5(PIOBU3)
PIOBU4: U24.R4(PIOBU4)
PIOBU5: U24.P5(PIOBU5)
PIOBU6: U24.P6(PIOBU6)
PIOBU7: U24.M8(PIOBU7)
PMIC_CHGLEV_PA12: R26.1 U2.22(CHGLEV) U24.N15(PA12)
PMIC_IRQ_PB13: R7.2 R17.1 U24.B4(PB13)
PMIC_LBO/EXP_PC8: R20.1 U24.J10(PC08)
PMIC_TWCK0_PD22: R97.2 U2.26(SCL)
PMIC_TWD0_PD21: R107.2 U2.27(SDA)
QSPI0_CS: R218.2 U10.1(CS#) U15.4(Y)
QSPI0_CS_PA23: R164.2 U15.2(A)
QSPI0_IO0_PA24: R157.2 U10.5(SI/SIO0)
QSPI0_IO1_PA25: R168.2 U10.2(SO/SIO1)
QSPI0_IO2_PA26: R169.2 U10.3(SIO2)
QSPI0_IO3_PA27: R167.2 U10.7(SIO3)
QSPI0_SCK_PA22: R165.2 U10.6(SCLK)
RESET: R14.2 TP11.1(TP) U2.9(NPBIN)
RXD: U24.N4(RXD)
SDHC0_CD_PA13: Q6.3(D) R230.2 U24.P16(PA13)
SDHC0_CK_PA0: R140.1 U24.U11(PA00)
SDHC0_CMD_PA1: R235.1 R236.2 U11.M5(CMD) U24.P10(PA01)
SDHC0_DAT0_PA2: R142.2 U11.A3(DAT0) U24.T11(PA02)
SDHC0_DAT1_PA3: R237.2 U11.A4(DAT1) U24.R10(PA03)
SDHC0_DAT2_PA4: R144.2 U11.A5(DAT2) U24.U12(PA04)
SDHC0_DAT3_PA5: R147.2 U11.B2(DAT3) U24.T12(PA05)
SDHC0_DAT4_PA6: R234.2 U11.B3(DAT4) U24.R12(PA06)
SDHC0_DAT5_PA7: R151.2 U11.B4(DAT5) U24.T13(PA07)
SDHC0_DAT6_PA8: R233.2 U11.B5(DAT6) U24.N10(PA08)
SDHC0_DAT7_PA9: R232.2 U11.B6(DAT7) U24.N11(PA09)
SDHC0_RSTN_PA10: R149.2 U11.K5(R\S\T\) U24.U13(PA10)
SDHC0_VDDSEL_PA11: U24.P15(PA11)
SDHC1_CD_PA30: U24.R15(PA30)
SDHC1_CK_PA22: R163.2
SDHC1_CMD_PA28: U24.R16(PA28)
SDHC1_DAT0_PA18: R154.2
SDHC1_DAT1_PA19: R159.2
SDHC1_DAT2_PA20: R143.2
SDHC1_DAT3_PA21: R145.2
SHDN: Q2.1(G) R9.1 U24.R1(SHDN)
SPI0_MISO_PA16: R173.2
SPI0_MOSI_PA15: R172.2
SPI0_NPCS0_PA17: R174.2
SPI0_SPCK_PA14: R175.2
USBA_DM: U24.R8(HHSDMA)
USBA_DP: U24.T8(HHSDPA)
USBA_VBUS_5V_PA31: U24.R17(PA31)
USBB_DM: U24.U9(HHSDMB)
USBB_DP: U24.U8(HHSDPB)
USBB_EN5V_PB10: R267.2
USBB_OVCUR_PA29: U24.T17(PA29)
USER_PB_PB9: R83.2
VSYS_5V: C8.2 C163.1 C164.1 C167.1 C176.1 D1.1(ANODE) R8.1 R15.2 R30.2 R332.2 R333.2 TP24.1(TP) U2.6(INL) U2.16(VP3) U2.31(VSYS1) U2.32(VSYS2) U2.35(VP2) U2.39(VP1) U2.40(NC1)
WAKE UP: Q3.3(D) R14.1 TP14.1(TP)
WKUP: Q9.3(D) R346.1 U24.P4(WKUP)
XIN: C48.1 R138.1 U24.U7(XIN) Y4.1
XIN32: C40.1 R103.2 U24.P1(XIN32) Y3.1
XOUT: C47.1 R138.2 U24.U6(XOUT) Y4.3
XOUT32: U24.P2(XOUT32)
XPRO_PD7: U24.J7(PD07)
XPRO_PD8: U24.J1(PD08)
XPRO_PD9: U24.K9(PD09)
XPRO_PD10: U24.J3(PD10)
XPRO_PD11: U24.M1(PD11)
XPRO_PD18: U24.J5(PD18)
N18279993: C43.1 R131.2
N27252638: C41.1 R103.1 Y3.4
N34092473: R140.2 R255.2 U11.M6(CLK)
N34149423: C79.1 C85.1 U11.C2(VDDI)
N35973957: C166.1 U2.1(REFBP)
N35973965: L5.1 U2.38(SW1)
N35973973: L6.1 U2.36(SW2)
N35974053: C13.1 L3.1 U2.7(OUT7)
N35974057: C10.2 Q3.1(G) R12.2 R13.1
N35974077: R195.1 U2.24(TH)
N35974129: L1.1 U2.15(SW3)
N35974203: C10.1 R9.2
N35974215: R27.1 U2.23(ISET)
N35974333: R44.1 U2.28(NSTAT)
N35974365: R21.2 R22.2 U2.20(LBI)
N35974369: Q1.1(G) Q2.3(D) R8.2
N35974465: Q1.3(D) R15.1 U2.10(PWRHLD)
N35974471: C169.1 R327.2 U2.4(OUT4)
N35974815: C173.1 R330.2 U2.8(OUT6)
N35974827: R18.2 R24.1 U2.21(ACIN)
N35974960: C8.1 R13.2
N35974983: R17.2 U2.12(NIRQ)
N35975004: R16.2 U2.11(NRSTO)
N35975018: R20.2 U2.19(NLBO)
N35975048: D1.2(CATHODE) R44.2
N35984128: L23.1 R303.1
N35984160: L19.1 R284.1
N36553366: C142.1 R269.2
N36625794: L12.1 R129.2
N36630600: L20.1 R293.2
N36838917: C55.1 L14.2 R181.1 R182.1
N36838919: C56.1 R182.2
N36840902: R238.1 U8.L8(ZQ)
N36841022: R124.1 U4.L8(ZQ)
N36930008: R128.2 U24.T2(JTAGSEL)
N36981838: C127.1 R263.1 U24.R6(VBG)
N37041066: C130.1 R270.1 U24.M6(ADVREFP)
N37448162: R278.1 U24.G10(PD00)
N37449174: R291.1 U24.E10(PD01)
N37540605: R297.1 R308.1 R309.1 U24.J4(PD05)
N37540654: R296.1 R306.1 R307.1 U24.J6(PD04)
N37719730: R319.2 U18.3(A2)
N38034659: C109.2 R256.2 U24.T10(SDCAL)
N38042255: R127.2 U24.P3(TST)
N38248254: L22.1 R300.2
N38426208: R178.1 R179.1 U8.K1(ODT)
N38442261: R254.1 R258.1 U4.K1(ODT)
N39320848: R30.1 R41.1 U2.25(VSEL)
N39383818: R63.2 R88.2
N40868741: C51.1 R146.1 R152.2 R155.1 U7.2(CATHODE)
N40878562: R155.2 R158.1 U7.1(REF)
N40895083: R100.2 R105.1 R123.1
N41880304: C106.1 R250.2 U24.E13(DDR_CAL)
N42269599: D6.2(A2) R280.2
N42277537: R281.2 U24.U2(NRST)
N42318507: Q8.3(D) Q9.1(G) R332.1
N42379535: Q6.1(G) R227.2
N42482892: R19.1 U2.18(PWREN)
N42876238: R167.1 U24.T16(PA27)
N42877639: D3.2(CATHODE) R63.1

Pads without a net: U4 J1 J9 L1 L9 M7 T7; U8 J1 J9 L1 L9 M7 T7; U11 A1 A2 A6 A7 A8 A9 A10 A11 A12 A13 A14 B1 B7 B8 B9 B10 B11 B12 B13 B14 C1 C3 C5 C7 C8 C9 C10 C11 C12 C13 C14 D1 D2 D3 D4 D12 D13 D14 E1 E2 E3 E5 E8 E9 E10 E12 E13 E14 F1 F2 F3 F10 F12 F13 F14 G1 G2 G3 G10 G12 G13 G14 H1 H2 H3 H5 H12 H13 H14 J1 J2 J3 J5 J12 J13 J14 K1 K2 K3 K6 K7 K10 K12 K13 K14 L1 L2 L3 L12 L13 L14 M1 M2 M3 M7 M8 M9 M10 M11 M12 M13 M14 N1 N3 N6 N7 N8 N9 N10 N11 N12 N13 N14 P1 P2 P7 P8 P9 P10 P11 P12 P13 P14

## Text on the board
Ref Des/Silkscreen Bottom: R | VDD_3V3_LP | A0 | A1 | A2 | A3 | A4 | A5 | A6 | A7 | VBAT | 3V3 | RST | 5V | GND | NC | A8 | A9 | CANRX1 | CANTX1 | CANRX0 | CANTX0 | A10 | A11 | VDD_3V3 | SPCK1 | MOSI1 | J16 | MISO1 | 5V/3V3 | VDDBU | F1_TXD | F1_RXD | F0_TXD | F0_RXD | F3_TXD | F3_RXD | SDA1 | SCL1 | F4_RXD | F4_TXD | 13 | 12 | 11 | 10 | 9 | 8 | 7 | 6 | 5 | 4 | 3 | 2 | 14 | 15 | 16 | 17 | 18 | 19 | 20 | 21 | 1 | 0 | SCL0 | SDA0 | AREF | VDD_CORE | VDDIODDR | VDD_5V_IN | ANALOG IN | COMMUNICATION | PWM | PCB:A08-2388/2 | TM
User.Comments: BOTTOM | MASK | INT4 | VCC5 | TOP | GND2 | INT3 | 6 LAYER CROSS SECTION BUILD | PREPREG | ROUTING | PLANE
User.21: FIGURE | SIZE | 8.0 | 10.0 | 12.0 | 30.0 | 36.0 | 38.0 | 40.0 | 45.0 | 64.0 | 95.0 | 128.0 | 72.0 | 126.0 | 35.0x30.0 | 53.0x26.0 | DRILL CHART: TOP to BOTTOM | ALL UNITS ARE IN MILS | PLATED | NON-PLATED | QTY | 544 | 656 | 182 | 8 | 6 | 121 | 4 | 1 | 3 | 2
